# Altium PCB LCboardPCB.PcbDoc (part 1 of 2)
Units mil, origin at the board's own origin, x right, y up, seen from the top; angles counter-clockwise.
Board outline 1635 x 3515 mil, 6 copper layers (Top Layer, Mid-Layer 1, Internal Plane 1, Internal Plane 2, Mid-Layer 2, Bottom Layer); 117 components, 210 nets, 605 pads, 96 vias.
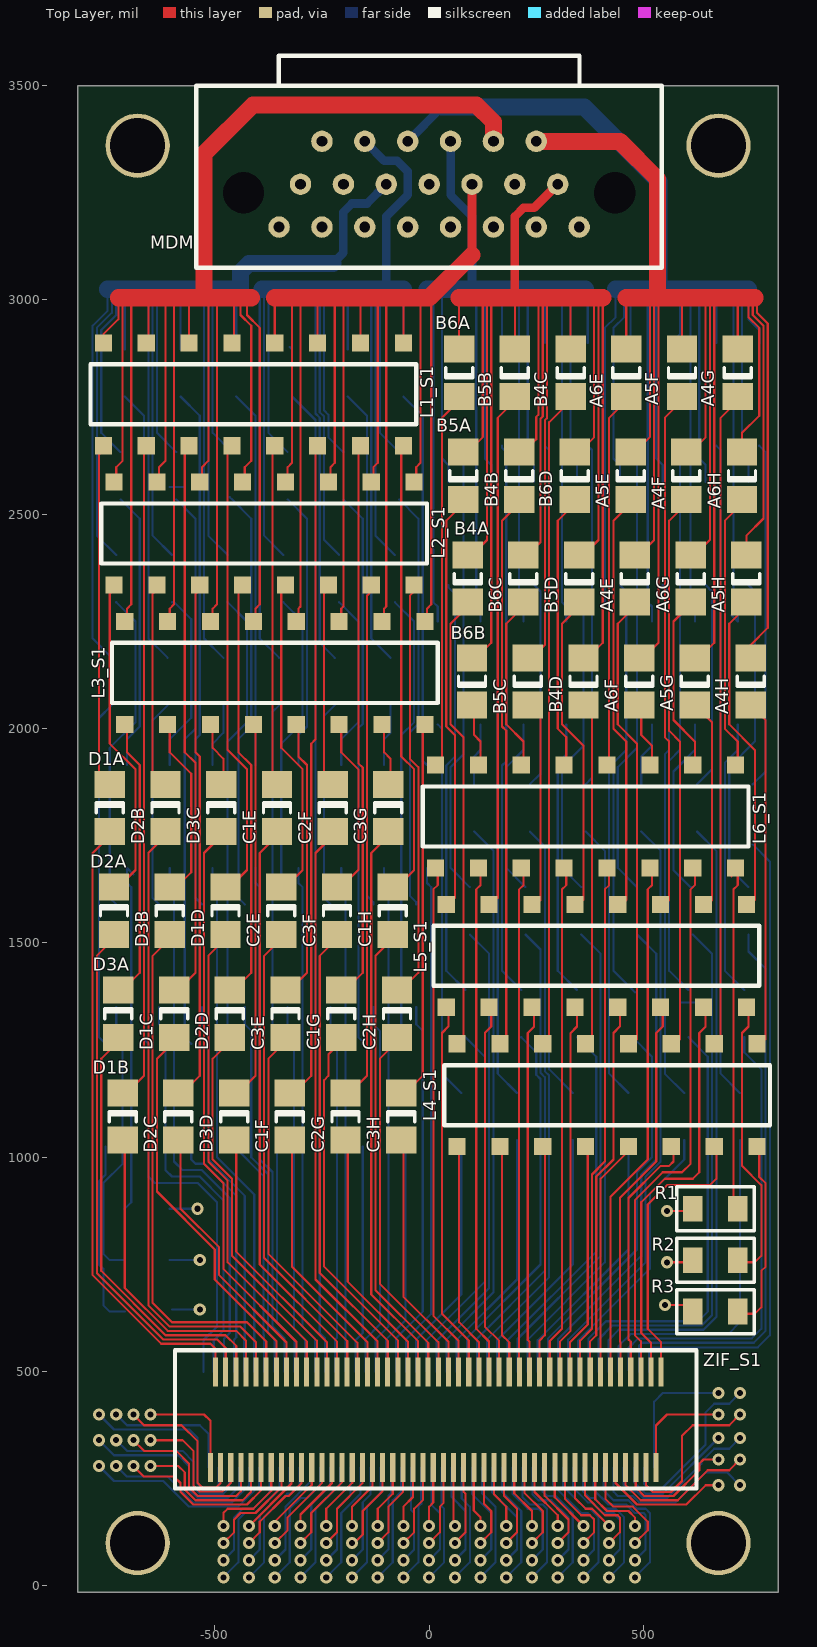
[diagram p0: Top Layer view]
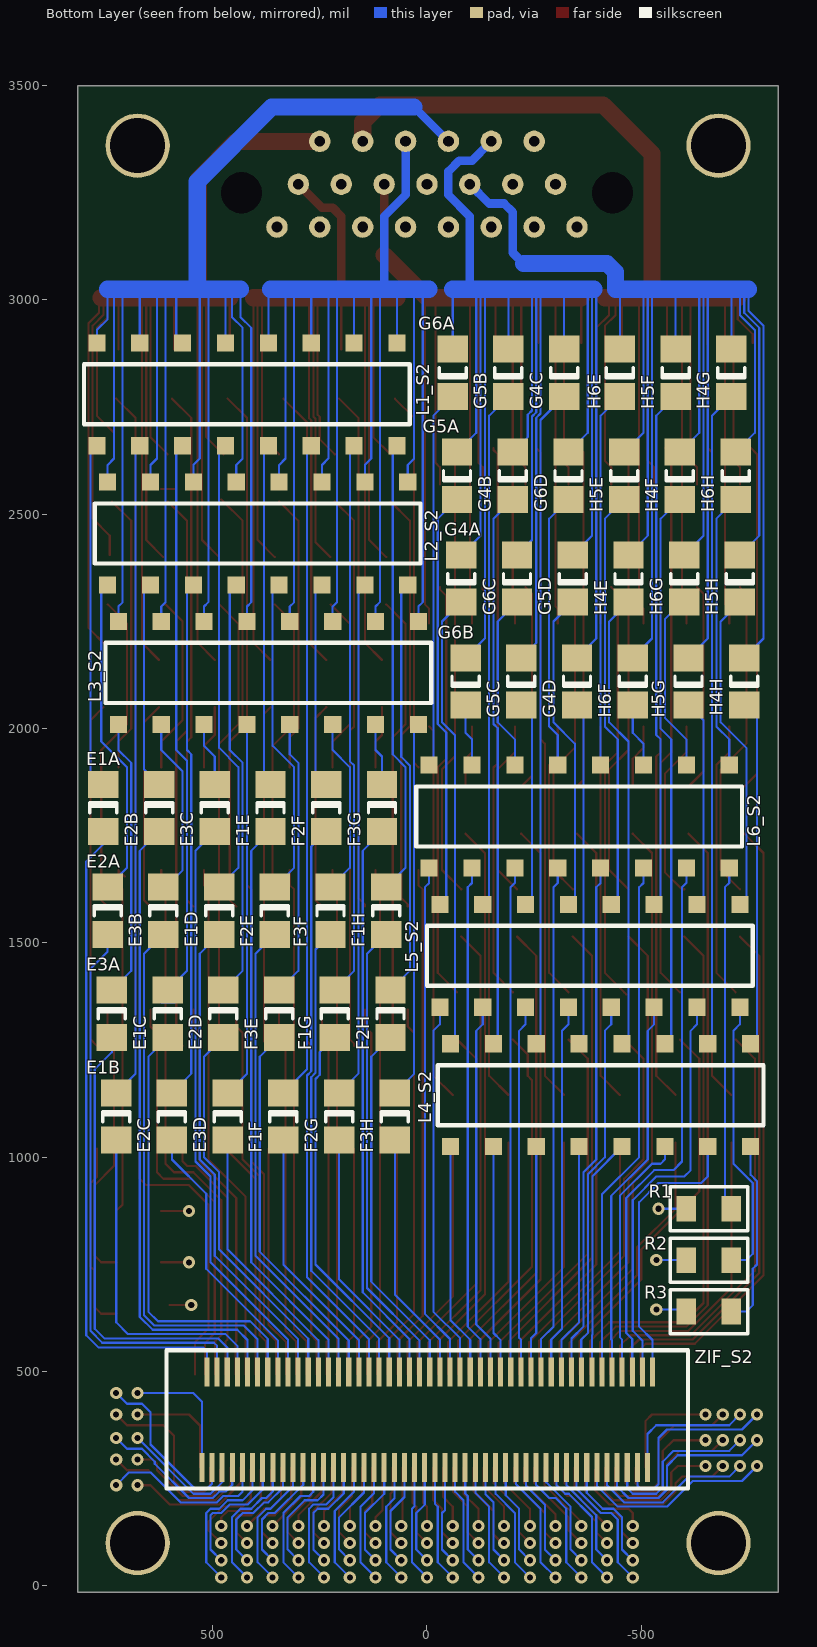
[diagram p1: Bottom Layer view, seen from below]
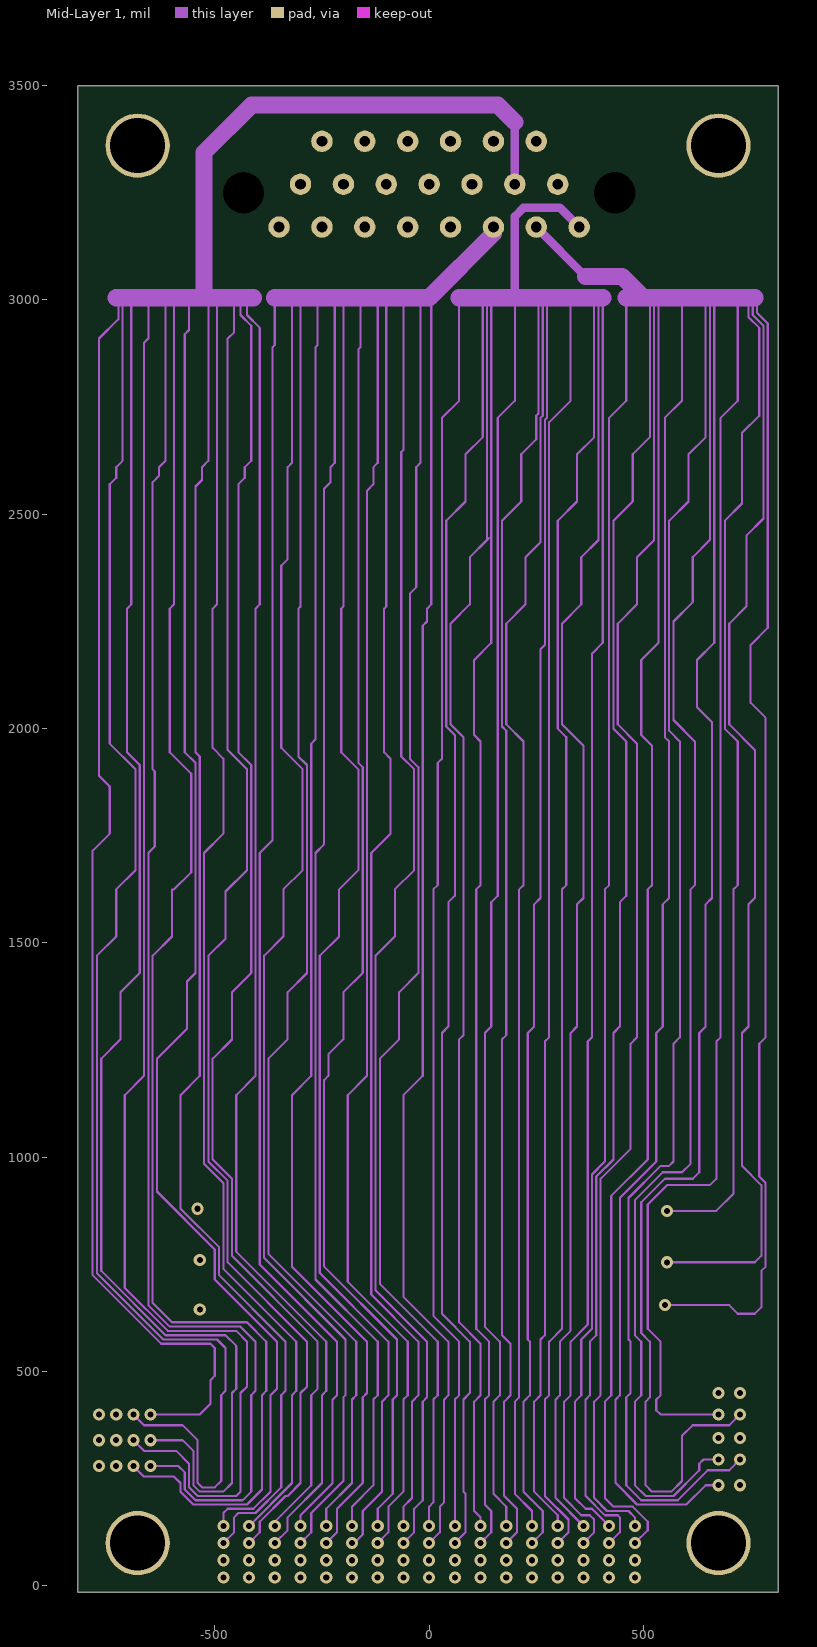
[diagram p2: Mid-Layer 1]
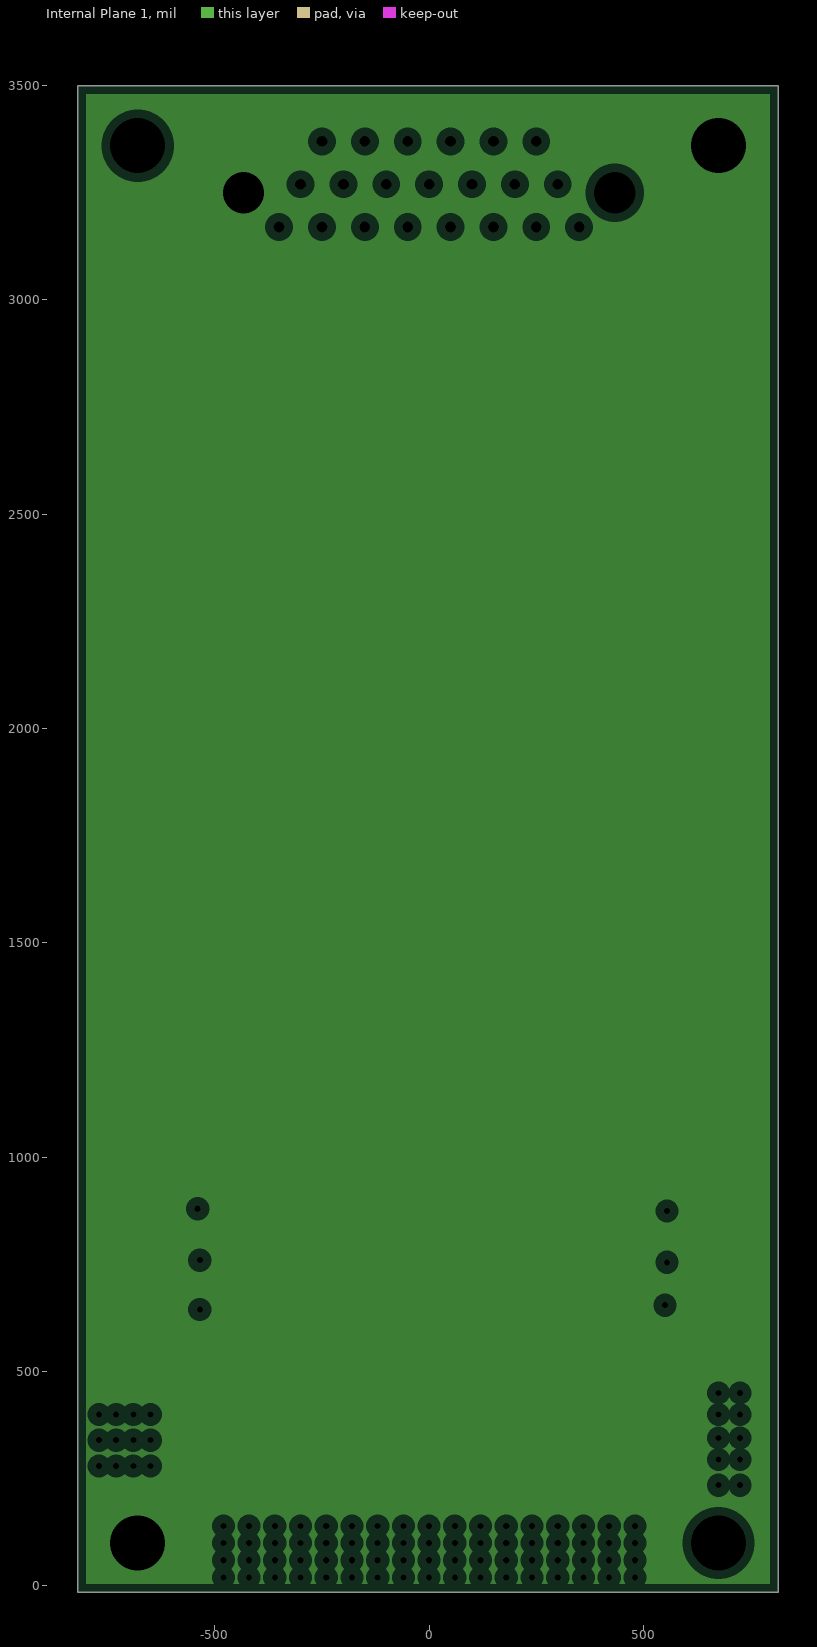
[diagram p3: Internal Plane 1, clearances drawn from the general rule]
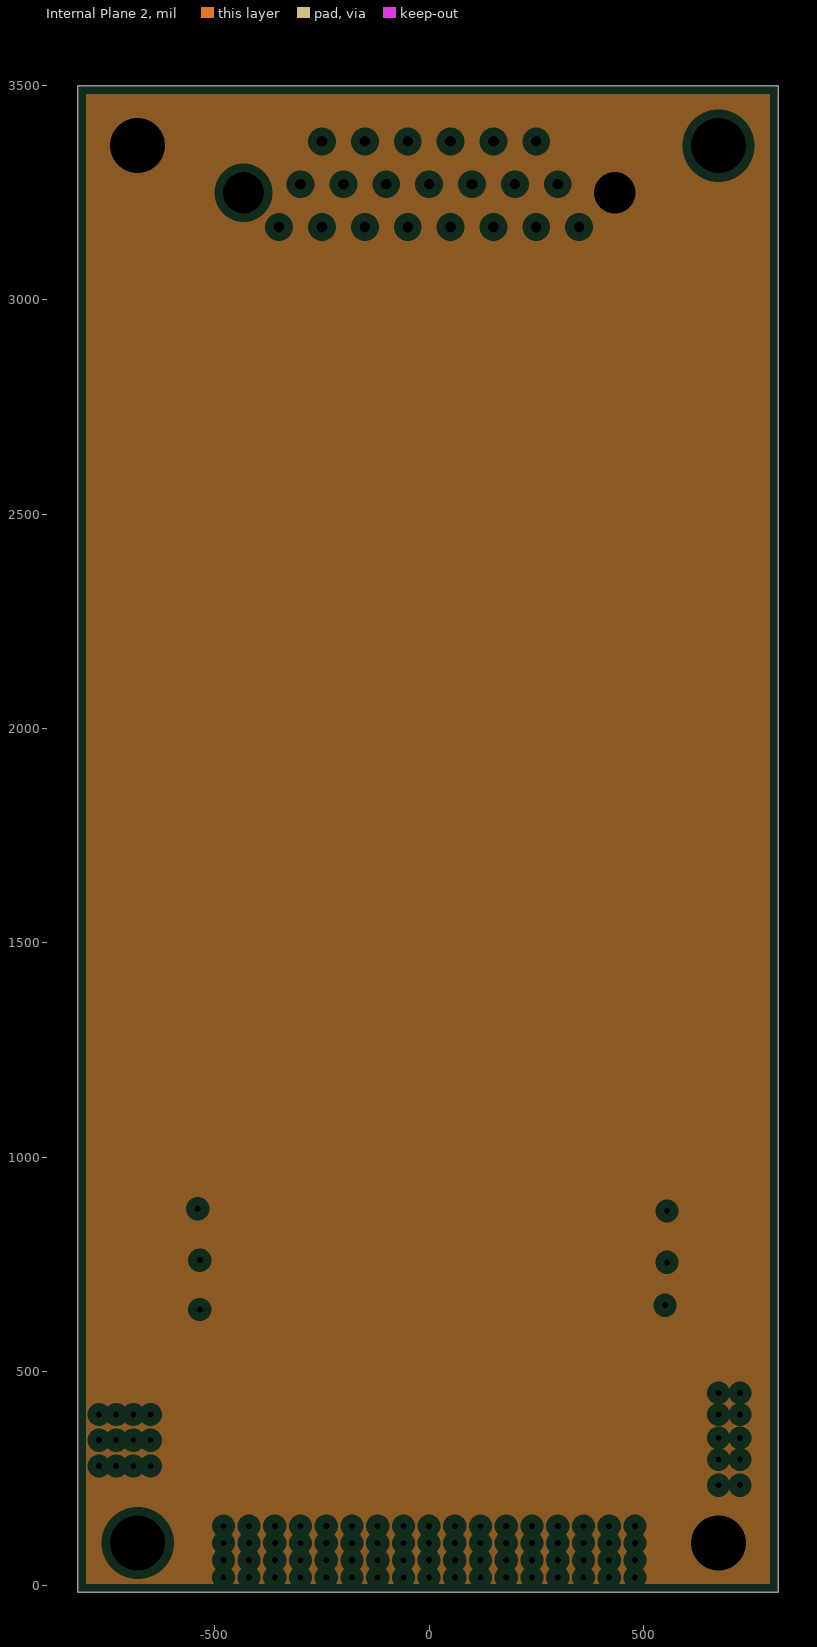
[diagram p4: Internal Plane 2, clearances drawn from the general rule]
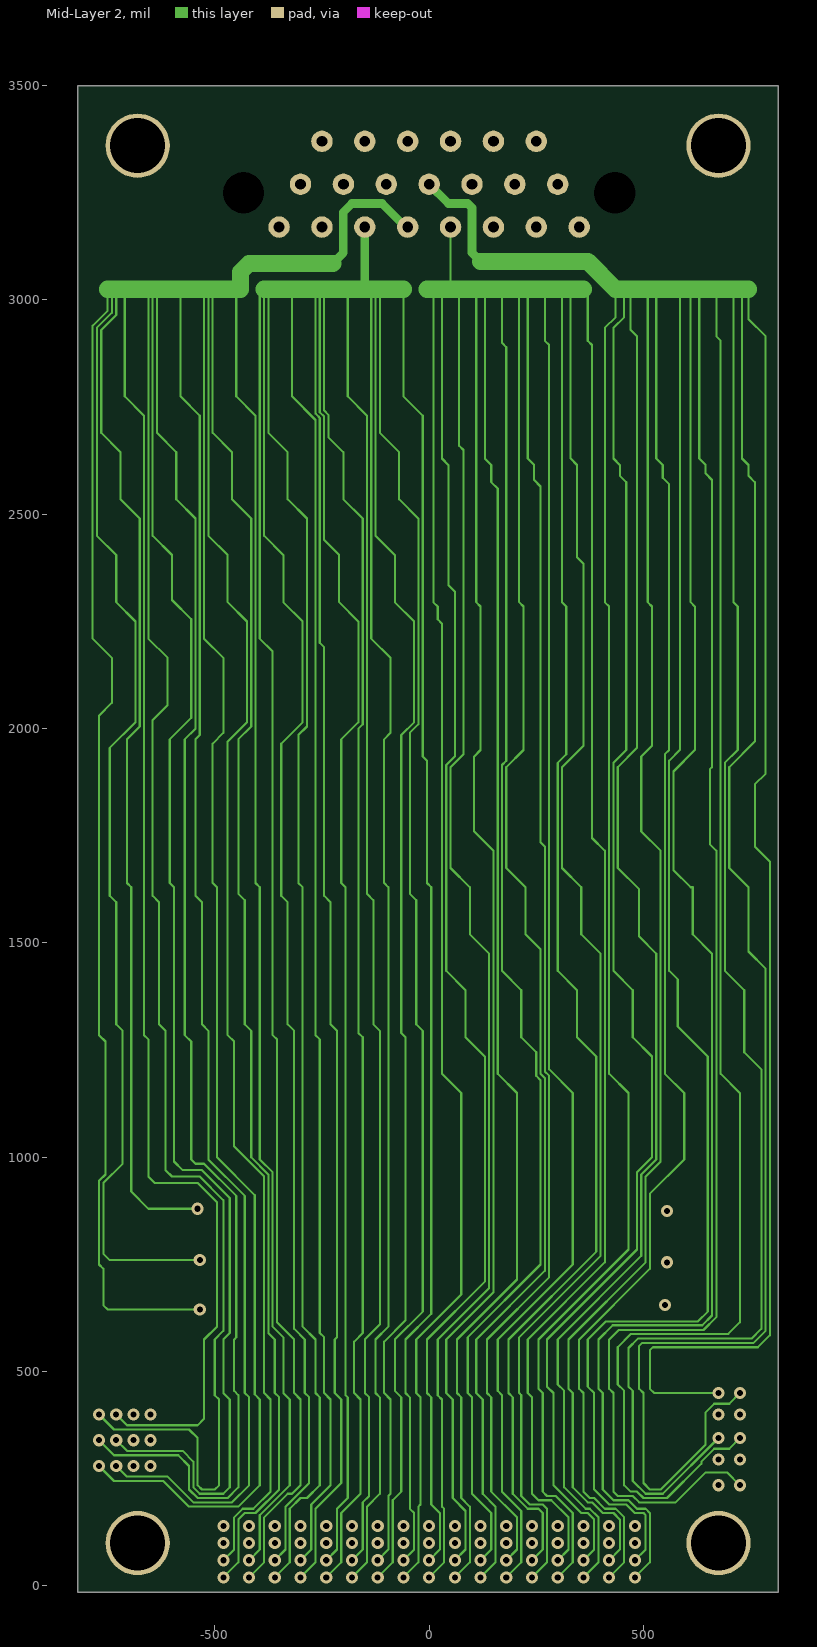
[diagram p5: Mid-Layer 2]

## Layer stack, top to bottom
Top Layer: signal copper 1.4
Dielectric: core 12.6, FR-4, Dk 4.8
Mid-Layer 1: signal copper 1.4
Dielectric: prepreg 12.6, FR-4, Dk 4.8
Internal Plane 1: plane copper 1.4, net GND1
Dielectric: core 12.6, FR-4, Dk 4.8
Internal Plane 2: plane copper 1.4, net GND2
Dielectric: prepreg 12.6, FR-4, Dk 4.8
Mid-Layer 2: signal copper 1.4
Dielectric: core 12.6, FR-4, Dk 4.8
Bottom Layer: signal copper 1.4

## Board outline
-820,3500 -820,-15 815,-15 815,3500 -820,3500

## Design rules (kind name [scope] priority, off if disabled: settings)
Clearance [All] p1: gap=5
ComponentClearance [All] p1: gap=9 collisioncheckmode=3 verticalgap=10 showdistances=FALSE
HoleSize [All] p1: absolutevalues=TRUE maxlimit=200 minlimit=1 maxpercent=80.000 minpercent=20.000
HoleToHoleClearance [All] p1: gap=5 allowstackedmicrovias=TRUE
MinimumSolderMaskSliver [All] p1: minsoldermaskwidth=4
PlaneClearance [All] p1: clearance=20
PlaneConnect [All] p1: planeconnectstyle=Relief reliefexpansion=20 reliefentries=4 reliefconductorwidth=10 reliefairgap=10
PolygonConnect [All] p1: connectstyle=Relief reliefconductorwidth=10 reliefentries=4 polygonreliefangle="90 Angle"
RoomDefinition S2 [InComponentClass('S2')] p1: confinementstyle=ConfineIn formatcopy=TRUE lockcomponents=TRUE outline 860,200 -840,200 -840,3000 860,3000
RoomDefinition S1 [InComponentClass('S1')] p2: confinementstyle=ConfineIn formatcopy=TRUE lockcomponents=TRUE outline -850,200 850,200 850,3000 -850,3000
RoomDefinition LCboardRev2 [InComponentClass('LCboardRev2')] p3: confinementstyle=ConfineIn formatcopy=TRUE lockcomponents=FALSE outline -895,-125 889,-125 889,3654 -895,3654
RoutingVias [All] p1: holewidth=14.17 width=28.35 viastyle="Through Hole" minholewidth=14.17 minwidth=28.35 maxholewidth=28 maxwidth=50
SilkToSilkClearance [All] p1 off: silktosilkclearance=5
SilkscreenOverComponentPads [All] p1: minsilkscreentomaskgap=5
SolderMaskExpansion [All] p1: expansion=3.5
Width [All] p1: maxlimit=100 minlimit=5 preferedwidth=5
20 further rules are at their usual default settings.

## Classes and differential pairs
component class S2: E1A E1B E1C E1D E2A E2B E2C E2D E3A E3B E3C E3D F1E F1F F1G F1H F2E F2F F2G F2H F3E F3F F3G F3H G4A G4B G4C G4D G5A G5B G5C G5D G6A G6B G6C G6D H4E H4F H4G H4H H5E H5F H5G H5H H6E H6F H6G H6H L1_S2 L2_S2 L3_S2 L4_S2 L5_S2 L6_S2 R1 R2 R3 ZIF_S2
component class S1: A4E A4F A4G A4H A5E A5F A5G A5H A6E A6F a6g a6h B4A B4B B4C B4D B5A B5B B5C B5D B6A B6B B6C B6D C1E C1F C1G C1H C2E C2F C2G C2H C3E C3F C3G C3H D1A D1B D1C D1D D2A D2B D2C D2D D3A D3B D3C D3D L1_S1 L2_S1 L3_S1 L4_S1 L5_S1 L6_S1 R1 R1_S1 R2 R2_S1 R3 R3_S1 ZIF_S1
channel class OneSideOfBoard: S1 S2
component class LCboardRev2: MDM

## Components (designator, comment, footprint, x,y, rotation, side; value= is the part's Value field where it differs from the comment)
A4E "47nF" CC3216-1206 480,2350 r90 top (schematic designator C7)
A4F "47nF" CC3216-1206 600,2590 r90 top (schematic designator C19)
A4G "47nF" CC3216-1206 720,2830 r90 top (schematic designator C31)
A4H "47nF" CC3216-1206 750,2110 r90 top (schematic designator C43)
A5E "47nF" CC3216-1206 470,2590 r90 top (schematic designator C9)
A5F "47nF" CC3216-1206 590,2830 r90 top (schematic designator C21)
A5G "47nF" CC3216-1206 620,2110 r90 top (schematic designator C33)
A5H "47nF" CC3216-1206 740,2350 r90 top (schematic designator C45)
A6E "47nF" CC3216-1206 460,2830 r90 top (schematic designator C11)
A6F "47nF" CC3216-1206 490,2110 r90 top (schematic designator C23)
A6G "47nF" CC3216-1206 610,2350 r90 top (schematic designator C35)
A6H "47nF" CC3216-1206 730,2590 r90 top (schematic designator C47)
B4A "47nF" CC3216-1206 90,2350 r90 top (schematic designator C8)
B4B "47nF" CC3216-1206 210,2590 r90 top (schematic designator C20)
B4C "47nF" CC3216-1206 330,2830 r90 top (schematic designator C32)
B4D "47nF" CC3216-1206 360,2110 r90 top (schematic designator C44)
B5A "47nF" CC3216-1206 80,2590 r90 top (schematic designator C10)
B5B "47nF" CC3216-1206 200,2830 r90 top (schematic designator C22)
B5C "47nF" CC3216-1206 230,2110 r90 top (schematic designator C34)
B5D "47nF" CC3216-1206 350,2350 r90 top (schematic designator C46)
B6A "47nF" CC3216-1206 70,2830 r90 top (schematic designator C12)
B6B "47nF" CC3216-1206 100,2110 r90 top (schematic designator C24)
B6C "47nF" CC3216-1206 220,2350 r90 top (schematic designator C36)
B6D "47nF" CC3216-1206 340,2590 r90 top (schematic designator C48)
C1E "47nF" CC3216-1206 -355,1815 r270 top (schematic designator C38)
C1F "47nF" CC3216-1206 -325,1095 r270 top (schematic designator C26)
C1G "47nF" CC3216-1206 -205,1335 r270 top (schematic designator C14)
C1H "47nF" CC3216-1206 -85,1575 r270 top (schematic designator C2)
C2E "47nF" CC3216-1206 -345,1575 r270 top (schematic designator C40)
C2F "47nF" CC3216-1206 -225,1815 r270 top (schematic designator C28)
C2G "47nF" CC3216-1206 -195,1095 r270 top (schematic designator C16)
C2H "47nF" CC3216-1206 -75,1335 r270 top (schematic designator C4)
C3E "47nF" CC3216-1206 -335,1335 r270 top (schematic designator C42)
C3F "47nF" CC3216-1206 -215,1575 r270 top (schematic designator C30)
C3G "47nF" CC3216-1206 -95,1815 r270 top (schematic designator C18)
C3H "47nF" CC3216-1206 -65,1095 r270 top (schematic designator C6)
D1A "47nF" CC3216-1206 -745,1815 r270 top (schematic designator C37)
D1B "47nF" CC3216-1206 -715,1095 r270 top (schematic designator C25)
D1C "47nF" CC3216-1206 -595,1335 r270 top (schematic designator C13)
D1D "47nF" CC3216-1206 -475,1575 r270 top (schematic designator C1)
D2A "47nF" CC3216-1206 -735,1575 r270 top (schematic designator C39)
D2B "47nF" CC3216-1206 -615,1815 r270 top (schematic designator C27)
D2C "47nF" CC3216-1206 -585,1095 r270 top (schematic designator C15)
D2D "47nF" CC3216-1206 -465,1335 r270 top (schematic designator C3)
D3A "47nF" CC3216-1206 -725,1335 r270 top (schematic designator C41)
D3B "47nF" CC3216-1206 -605,1575 r270 top (schematic designator C29)
D3C "47nF" CC3216-1206 -485,1815 r270 top (schematic designator C17)
D3D "47nF" CC3216-1206 -455,1095 r270 top (schematic designator C5)
E1A "47nF" CC3216-1206 755,1815 r270 bottom (schematic designator C37)
E1B "47nF" CC3216-1206 725,1095 r270 bottom (schematic designator C25)
E1C "47nF" CC3216-1206 605,1335 r270 bottom (schematic designator C13)
E1D "47nF" CC3216-1206 485,1575 r270 bottom (schematic designator C1)
E2A "47nF" CC3216-1206 745,1575 r270 bottom (schematic designator C39)
E2B "47nF" CC3216-1206 625,1815 r270 bottom (schematic designator C27)
E2C "47nF" CC3216-1206 595,1095 r270 bottom (schematic designator C15)
E2D "47nF" CC3216-1206 475,1335 r270 bottom (schematic designator C3)
E3A "47nF" CC3216-1206 735,1335 r270 bottom (schematic designator C41)
E3B "47nF" CC3216-1206 615,1575 r270 bottom (schematic designator C29)
E3C "47nF" CC3216-1206 495,1815 r270 bottom (schematic designator C17)
E3D "47nF" CC3216-1206 465,1095 r270 bottom (schematic designator C5)
F1E "47nF" CC3216-1206 365,1815 r270 bottom (schematic designator C38)
F1F "47nF" CC3216-1206 335,1095 r270 bottom (schematic designator C26)
F1G "47nF" CC3216-1206 215,1335 r270 bottom (schematic designator C14)
F1H "47nF" CC3216-1206 95,1575 r270 bottom (schematic designator C2)
F2E "47nF" CC3216-1206 355,1575 r270 bottom (schematic designator C40)
F2F "47nF" CC3216-1206 235,1815 r270 bottom (schematic designator C28)
F2G "47nF" CC3216-1206 205,1095 r270 bottom (schematic designator C16)
F2H "47nF" CC3216-1206 85,1335 r270 bottom (schematic designator C4)
F3E "47nF" CC3216-1206 345,1335 r270 bottom (schematic designator C42)
F3F "47nF" CC3216-1206 225,1575 r270 bottom (schematic designator C30)
F3G "47nF" CC3216-1206 105,1815 r270 bottom (schematic designator C18)
F3H "47nF" CC3216-1206 75,1095 r270 bottom (schematic designator C6)
G4A "47nF" CC3216-1206 -80,2350 r90 bottom (schematic designator C8)
G4B "47nF" CC3216-1206 -200,2590 r90 bottom (schematic designator C20)
G4C "47nF" CC3216-1206 -320,2830 r90 bottom (schematic designator C32)
G4D "47nF" CC3216-1206 -350,2110 r90 bottom (schematic designator C44)
G5A "47nF" CC3216-1206 -70,2590 r90 bottom (schematic designator C10)
G5B "47nF" CC3216-1206 -190,2830 r90 bottom (schematic designator C22)
G5C "47nF" CC3216-1206 -220,2110 r90 bottom (schematic designator C34)
G5D "47nF" CC3216-1206 -340,2350 r90 bottom (schematic designator C46)
G6A "47nF" CC3216-1206 -60,2830 r90 bottom (schematic designator C12)
G6B "47nF" CC3216-1206 -90,2110 r90 bottom (schematic designator C24)
G6C "47nF" CC3216-1206 -210,2350 r90 bottom (schematic designator C36)
G6D "47nF" CC3216-1206 -330,2590 r90 bottom (schematic designator C48)
H4E "47nF" CC3216-1206 -470,2350 r90 bottom (schematic designator C7)
H4F "47nF" CC3216-1206 -590,2590 r90 bottom (schematic designator C19)
H4G "47nF" CC3216-1206 -710,2830 r90 bottom (schematic designator C31)
H4H "47nF" CC3216-1206 -740,2110 r90 bottom (schematic designator C43)
H5E "47nF" CC3216-1206 -460,2590 r90 bottom (schematic designator C9)
H5F "47nF" CC3216-1206 -580,2830 r90 bottom (schematic designator C21)
H5G "47nF" CC3216-1206 -610,2110 r90 bottom (schematic designator C33)
H5H "47nF" CC3216-1206 -730,2350 r90 bottom (schematic designator C45)
H6E "47nF" CC3216-1206 -450,2830 r90 bottom (schematic designator C11)
H6F "47nF" CC3216-1206 -480,2110 r90 bottom (schematic designator C23)
H6G "47nF" CC3216-1206 -600,2350 r90 bottom (schematic designator C35)
H6H "47nF" CC3216-1206 -720,2590 r90 bottom (schematic designator C47)
L1_S1 "8 inductors" "LCBOARDINDUCTOR8 - MECH2" -60,2900 r270 top (schematic designator L1)
L1_S2 "8 inductors" "LCBOARDINDUCTOR8 - MECH3" 70,2900 r270 bottom (schematic designator L1)
L2_S1 "8 inductors" "LCBOARDINDUCTOR8 - MECH2" -35,2575 r270 top (schematic designator L2)
L2_S2 "8 inductors" "LCBOARDINDUCTOR8 - MECH3" 45,2575 r270 bottom (schematic designator L2)
L3_S1 "8 inductors" "LCBOARDINDUCTOR8 - MECH2" -10,2250 r270 top (schematic designator L3)
L3_S2 "8 inductors" "LCBOARDINDUCTOR8 - MECH3" 20,2250 r270 bottom (schematic designator L3)
L4_S1 "8 inductors" "LCBOARDINDUCTOR8 - MECH2" 65,1025 r90 top (schematic designator L4)
L4_S2 "8 inductors" "LCBOARDINDUCTOR8 - MECH3" -55,1025 r90 bottom (schematic designator L4)
L5_S1 "8 inductors" "LCBOARDINDUCTOR8 - MECH2" 40,1350 r90 top (schematic designator L5)
L5_S2 "8 inductors" "LCBOARDINDUCTOR8 - MECH3" -30,1350 r90 bottom (schematic designator L5)
L6_S1 "8 inductors" "LCBOARDINDUCTOR8 - MECH2" 15,1675 r90 top (schematic designator L6)
L6_S2 "8 inductors" "LCBOARDINDUCTOR8 - MECH3" -5,1675 r90 bottom (schematic designator L6)
MDM "LCBoard_GlenairMicroDsub21" MicroD-MWDM2L-21SCBRP-.110 -300,3270 r0 top (schematic designator J1)
R1 "" 1206 -605,880 r180 bottom
R1 "" 1206 615,880 r0 top
R2 "" 1206 -605,760 r180 bottom
R2 "" 1206 615,760 r0 top
R3 "" 1206 -605,640 r180 bottom
R3 "" 1206 615,640 r0 top
ZIF_S1 "ZIF Connector" LCBoard_ZIFCon#1 -510,310 r0 top (schematic designator J2)
ZIF_S2 "ZIF Connector" LCBoard_ZIFCon#2 525,310 r180 bottom (schematic designator J2)

## Footprints (in the part's own frame and the unit in brackets; to place one, negate y for a bottom-side part, rotate by r counter-clockwise, add the part's x,y. Pads: shape width x height; smd on the part's side, far side on the other; paste and mask are expansions set on the pad)
1206 [mil]
  rect 45x60 smd: 1(0,0) 2(105,0)
  silkscreen extent -37,-51 144,51
CC3216-1206 [mm]
  rect 1.6x1.8 smd: 1(-1.4,0) 2(1.4,0)
  silkscreen extent -0.3,-0.8 0.3,0.8
LCBoard_ZIFCon#1 [mm] "HFP190CT-ND"
  rect 0.3x1.7 smd: 1(0,-0.85) 2(0.3,4.8) 3(0.6,-0.85) 4(0.9,4.8) 5(1.2,-0.85) 6(1.5,4.8) 7(1.8,-0.85) 8(2.1,4.8) 9(2.4,-0.85) 10(2.7,4.8) 11(3,-0.85) 12(3.3,4.8) 13(3.6,-0.85) 14(3.9,4.8) 15(4.2,-0.85) 16(4.5,4.8) 17(4.8,-0.85) 18(5.1,4.8) 19(5.4,-0.85) 20(5.7,4.8) 21(6,-0.85) 22(6.3,4.8) 23(6.6,-0.85) 24(6.9,4.8) 25(7.2,-0.85) 26(7.5,4.8) 27(7.8,-0.85) 28(8.1,4.8) 29(8.4,-0.85) 30(8.7,4.8) 31(9,-0.85) 32(9.3,4.8) 33(9.6,-0.85) 34(9.9,4.8) 35(10.2,-0.85) 36(10.5,4.8) 37(10.8,-0.85) 38(11.1,4.8) 39(11.4,-0.85) 40(11.7,4.8) 41(12,-0.85) 42(12.3,4.8) 43(12.6,-0.85) 44(12.9,4.8) 45(13.2,-0.85) 46(13.5,4.8) 47(13.8,-0.85) 48(14.1,4.8) 49(14.4,-0.85) 50(14.7,4.8) 51(15,-0.85) 52(15.3,4.8) 53(15.6,-0.85) 54(15.9,4.8) 55(16.2,-0.85) 56(16.5,4.8) 57(16.8,-0.85) 58(17.1,4.8) 59(17.4,-0.85) 60(17.7,4.8) 61(18,-0.85) 62(18.3,4.8) 63(18.6,-0.85) 64(18.9,4.8) 65(19.2,-0.85) 66(19.5,4.8) 67(19.8,-0.85) 68(20.1,4.8) 69(20.4,-0.85) 70(20.7,4.8) 71(21,-0.85) 72(21.3,4.8) 73(21.6,-0.85) 74(21.9,4.8) 75(22.2,-0.85) 76(22.5,4.8) 77(22.8,-0.85) 78(23.1,4.8) 79(23.4,-0.85) 80(23.7,4.8) 81(24,-0.85) 82(24.3,4.8) 83(24.6,-0.85) 84(24.9,4.8) 85(25.2,-0.85) 86(25.5,4.8) 87(25.8,-0.85) 88(26.1,4.8) 89(26.4,-0.85) 90(26.7,4.8)
  round 0.5 on Top Overlay: 2(-2.3,-2.4)
  silkscreen extent -2.1,-2.1 28.8,6.1
LCBoard_ZIFCon#2 [mm]
  rect 0.3x1.7 smd: 1(0,-0.85) 2(0.3,4.8) 3(0.6,-0.85) 4(0.9,4.8) 5(1.2,-0.85) 6(1.5,4.8) 7(1.8,-0.85) 8(2.1,4.8) 9(2.4,-0.85) 10(2.7,4.8) 11(3,-0.85) 12(3.3,4.8) 13(3.6,-0.85) 14(3.9,4.8) 15(4.2,-0.85) 16(4.5,4.8) 17(4.8,-0.85) 18(5.1,4.8) 19(5.4,-0.85) 20(5.7,4.8) 21(6,-0.85) 22(6.3,4.8) 23(6.6,-0.85) 24(6.9,4.8) 25(7.2,-0.85) 26(7.5,4.8) 27(7.8,-0.85) 28(8.1,4.8) 29(8.4,-0.85) 30(8.7,4.8) 31(9,-0.85) 32(9.3,4.8) 33(9.6,-0.85) 34(9.9,4.8) 35(10.2,-0.85) 36(10.5,4.8) 37(10.8,-0.85) 38(11.1,4.8) 39(11.4,-0.85) 40(11.7,4.8) 41(12,-0.85) 42(12.3,4.8) 43(12.6,-0.85) 44(12.9,4.8) 45(13.2,-0.85) 46(13.5,4.8) 47(13.8,-0.85) 48(14.1,4.8) 49(14.4,-0.85) 50(14.7,4.8) 51(15,-0.85) 52(15.3,4.8) 53(15.6,-0.85) 54(15.9,4.8) 55(16.2,-0.85) 56(16.5,4.8) 57(16.8,-0.85) 58(17.1,4.8) 59(17.4,-0.85) 60(17.7,4.8) 61(18,-0.85) 62(18.3,4.8) 63(18.6,-0.85) 64(18.9,4.8) 65(19.2,-0.85) 66(19.5,4.8) 67(19.8,-0.85) 68(20.1,4.8) 69(20.4,-0.85) 70(20.7,4.8) 71(21,-0.85) 72(21.3,4.8) 73(21.6,-0.85) 74(21.9,4.8) 75(22.2,-0.85) 76(22.5,4.8) 77(22.8,-0.85) 78(23.1,4.8) 79(23.4,-0.85) 80(23.7,4.8) 81(24,-0.85) 82(24.3,4.8) 83(24.6,-0.85) 84(24.9,4.8) 85(25.2,-0.85) 86(25.5,4.8) 87(25.8,-0.85) 88(26.1,4.8) 89(26.4,-0.85) 90(26.7,4.8)
  round 0.5 on Bottom Overlay: 2(-2.3,-2.4)
  silkscreen extent -2.1,-2.1 28.8,6.1
"LCBOARDINDUCTOR8 - MECH2" [mil]
  rect 40x40 smd: 1(0,0) 2(0,-100) 3(0,-200) 4(0,-300) 5(0,-400) 6(0,-500) 7(0,-600) 8(0,-700) 9(240,-700) 10(240,-600) 11(240,-500) 12(240,-400) 13(240,-300) 14(240,-200) 15(240,-100) 16(240,0)
  silkscreen extent 50,-730 190,30
"LCBOARDINDUCTOR8 - MECH3" [mil]
  rect 40x40 smd: 1(0,0) 2(0,-100) 3(0,-200) 4(0,-300) 5(0,-400) 6(0,-500) 7(0,-600) 8(0,-700) 9(240,-700) 10(240,-600) 11(240,-500) 12(240,-400) 13(240,-300) 14(240,-200) 15(240,-100) 16(240,0)
  silkscreen extent 50,-730 190,30
MicroD-MWDM2L-21SCBRP-.110 [mil] "Glenair MicroD 21 pin"
  round 50 hole 25: 1(600,0) 2(550,100) 3(450,100) 4(400,0) 5(350,100) 6(250,100) 7(200,0) 8(150,100) 9(100,0) 10(50,100) 11(0,0) 12(650,-100) 13(550,-100) 14(500,0) 15(450,-100) 16(350,-100) 17(300,0) 18(250,-100) 19(150,-100) 20(50,-100) 21(-50,-100)
  round 60 hole 96: MH1(-133,-20) MH2(733,-20)
  silkscreen extent -243,-195 843,300

## Part data
A4E A4F A4G A4H A5E A5F A5G A5H A6E A6F A6G A6H B4A B4B B4C B4D B5A B5B B5C B5D B6A B6B B6C B6D C1E C1F C1G C1H C2E C2F C2G C2H C3E C3F C3G C3H D1A D1B D1C D1D D2A D2B D2C D2D D3A D3B D3C D3D E1A E1B E1C E1D E2A E2B E2C E2D E3A E3B E3C E3D F1E F1F F1G F1H F2E F2F F2G F2H F3E F3F F3G F3H G4A G4B G4C G4D G5A G5B G5C G5D G6A G6B G6C G6D H4E H4F H4G H4H H5E H5F H5G H5H H6E H6F H6G H6H: library part "Cap Semi_1", "Capacitor (Semiconductor SIM Model)"
L1_S1 L1_S2 L2_S1 L2_S2 L3_S1 L3_S2 L4_S1 L4_S2 L5_S1 L5_S2 L6_S1 L6_S2: library part LCboardInductor8
R1 R1 R2 R2 R3 R3: library part Res1206, "Resistor"
ZIF_S1 ZIF_S2: library part LCboard_FH16-90S-0.3SHW(05)

## Free pads (board coordinates)
  round 150 hole 128.5: 0(-680,100) 0(-680,3360) 0(675,100) 0(675,3360)

## Via types
v1: diameter 28.35, hole 14.17, Top Layer to Bottom Layer, 96 vias

## Nets (pads, with @x,y where several pads share a name; then routed paths per layer and width w, separated by ;. In a path a pad name is that pad's centre, name@x,y a point inside that pad or via, vN(x,y) a via of type N, cw(c..) or ccw(c..) an arc to the next point about the centre after c; other vN are vias at no path point)
GND1: MDM.MH1 pad.0@675,3360 pad.0@-680,100
GND2: MDM.MH2 pad.0@675,100 pad.0@-680,3360
NetC1_S1_1: D1D.1 L1_S1.12 | length 1073.4
  Top Layer w5: D1D.1@-470,1625.12 -425,1670.12 -425,1905 -470,1950 -470,2640 L1_S1.12@-455,2655
NetC1_S1_2: D1D.2 ZIF_S1.20 | length 1134.6
  Top Layer w5: D1D.2@-470,1514.88 -515,1469.88 -515,990 -470,945 -470,755 -285.59,570.59 ZIF_S1.20@-285.59,498.98 ZIF_S1.20@-285.59,493.98
NetC1_S2_1: E1D.1 L1_S2.12 | length 1073.4
  Bottom Layer w5: L1_S2.12@470,2660 485,2645 485,1955 440,1910 440,1675.12 E1D.1@485,1630.12
NetC1_S2_2: E1D.2 ZIF_S2.20 | length 1134.6
  Bottom Layer w5: ZIF_S2.20@300.59,498.98 300.59,575.59 495,770 495,960 530,995 530,1474.88 E1D.2@485,1519.88
NetC2_S1_1: C1H.1 L1_S1.16 | length 1065.1
  Top Layer w5: C1H.1@-80,1625.12 -35,1670.12 -35,1905 -65,1935 -65,2645 L1_S1.16@-55,2655
NetC2_S1_2: C1H.2 ZIF_S1.44 | length 1090.4
  Top Layer w5: C1H.2@-80,1514.88 -125,1469.88 -125,690 -2.13,567.13 ZIF_S1.44@-2.13,493.98
NetC2_S2_1: F1H.1 L1_S2.16 | length 1065.1
  Bottom Layer w5: L1_S2.16@70,2660 80,2650 80,1940 50,1910 50,1675.12 F1H.1@95,1630.12
NetC2_S2_2: F1H.2 ZIF_S2.44 | length 1090.4
  Bottom Layer w5: ZIF_S2.44@17.13,498.98 17.13,572.13 140,695 140,1474.88 F1H.2@95,1519.88
NetC3_S1_1: D2D.1 L2_S1.12 | length 989.2
  Top Layer w5: D2D.1@-465,1380.12 -460,1385.12 -415,1430.12 -415,1915 -445,1945 -445,2315 L2_S1.12@-430,2330
NetC3_S1_2: D2D.2 ZIF_S1.22 | length 900.2
  Top Layer w5: D2D.2@-460,1274.88 -505,1229.88 -505,995 -460,950 -460,770 -261.97,571.97 ZIF_S1.22@-261.97,498.98 ZIF_S1.22@-261.97,493.98
NetC3_S2_1: E2D.1 L2_S2.12 | length 989.2
  Bottom Layer w5: L2_S2.12@445,2335 460,2320 460,1950 430,1920 430,1435.12 E2D.1@475,1390.12 E2D.1@480,1385.12
NetC3_S2_2: E2D.2 ZIF_S2.22 | length 900.2
  Bottom Layer w5: ZIF_S2.22@276.97,498.98 276.97,576.97 485,785 485,965 520,1000 520,1234.88 E2D.2@475,1279.88
NetC4_S1_1: C2H.1 L2_S1.16 | length 978
  Top Layer w5: C2H.1@-70,1385.12 -25,1430.12 -25,1910 -45,1930 -45,2310 -30,2325 L2_S1.16@-30,2330
NetC4_S1_2: C2H.2 ZIF_S1.46 | length 856.1
  Top Layer w5: C2H.2@-70,1274.88 -115,1229.88 -115,705 21.5,568.5 ZIF_S1.46@21.5,493.98
NetC4_S2_1: F2H.1 L2_S2.16 | length 978
  Bottom Layer w5: L2_S2.16@45,2335 45,2330 60,2315 60,1934.14 40,1914.14 40,1435.12 F2H.1@85,1390.12
NetC4_S2_2: F2H.2 ZIF_S2.46 | length 856.1
  Bottom Layer w5: ZIF_S2.46@-6.5,498.98 -6.5,573.5 130,710 130,1234.88 F2H.2@85,1279.88
NetC5_S1_1: D3D.1 L3_S1.12 | length 878.5
  Top Layer w5: D3D.1@-450,1145.12 -405,1190.12 L3_S1.12@-405,2005
NetC5_S1_2: D3D.2 ZIF_S1.24 | length 628.6
  Top Layer w5: D3D.2@-450,1034.88 -450,780 -238.35,568.35 ZIF_S1.24@-238.35,493.98
NetC5_S2_1: E3D.1 L3_S2.12 | length 878.5
  Bottom Layer w5: L3_S2.12@420,2010 420,1195.12 E3D.1@465,1150.12
NetC5_S2_2: E3D.2 ZIF_S2.24 | length 628.6
  Bottom Layer w5: ZIF_S2.24@253.35,498.98 253.35,573.35 465,785 E3D.2@465,1039.88
NetC6_S1_1: C3H.1 L3_S1.16 | length 882.7
  Top Layer w5: C3H.1@-60,1145.12 -15,1190.12 -15,1995 L3_S1.16@-5,2005
NetC6_S1_2: C3H.2 ZIF_S1.48 | length 584.4
  Top Layer w5: C3H.2@-60,1034.88 -60,675 45.12,569.88 ZIF_S1.48@45.12,493.98
NetC6_S2_1: F3H.1 L3_S2.16 | length 882.7
  Bottom Layer w5: L3_S2.16@20,2010 30,2000 30,1195.12 F3H.1@75,1150.12
NetC6_S2_2: F3H.2 ZIF_S2.48 | length 584.4
  Bottom Layer w5: ZIF_S2.48@-30.12,498.98 -30.12,574.88 75,680 F3H.2@75,1039.88
NetC7_S1_1: A4E.1 L4_S1.12 | length 1073.4
  Top Layer w5: L4_S1.12@470,1260 485,1275 485,1965 440,2010 440,2244.88 A4E.1@485,2289.88
NetC7_S1_2: A4E.2 A4F.2 A4G.2 A4H.2 A5E.2 A5F.2 A5G.2 A5H.2 A6E.2 A6F.2 A6G.2 A6H.2 MDM.2 | length 6850.2
  Top Layer w5: A6E.2@460,2885.12 460,3005 ; A5E.2@475,2640.12 515,2680.12 515,3005 ; A4E.2@485,2400.12 525,2440.12 525,3005 ; A6F.2@495,2160.12 535,2200.12 535,3005 ; A5F.2@590,2885.12 590,3005 ; A4F.2@605,2640.12 645,2680.12 645,3005 ; A6G.2@615,2400.12 655,2440.12 655,3005 ; A5G.2@625,2160.12 665,2200.12 665,3005 ; A4G.2@720,2885.12 720,3005 ; A6H.2@730,2645.12 730,2690 770,2730 770,2935 745,2960 745,3005 ; A5H.2@740,2405.12 740,2450 780,2490 780,2940 755,2965 755,2995 ; A4H.2@750,2165.12 750,2195 790,2235 790,2945 765,2970 765,3000
  Top Layer w40: MDM.2@250,3370 445,3370 533,3282 533,3005 ; 460,3005 515,3005 525,3005 590,3005 645,3005 655,3005 665,3005 720,3005 745,3005 760,3005
NetC7_S2_1: H4E.1 L4_S2.12 | length 1073.4
  Bottom Layer w5: H4E.1@-470,2294.88 -425,2249.88 -425,2015 -470,1970 -470,1280 L4_S2.12@-455,1265
NetC7_S2_2: H4E.2 H4F.2 H4G.2 H4H.2 H5E.2 H5F.2 H5G.2 H5H.2 H6E.2 H6F.2 H6G.2 H6H.2 MDM.7 | length 7006.1
  Bottom Layer w5: -750,3015 -750,2975 -785,2940 -785,2210.12 H4H.2@-740,2165.12 ; -740,3020 -740,2970 -775,2935 -775,2450.12 H5H.2@-730,2405.12 ; -730,3005 -730,2965 -765,2930 -765,2690.12 H6H.2@-720,2645.12 ; H4G.2@-710,2885.12 -710,3025 ; H5G.2@-610,2165.12 -655,2210.12 -655,3005 -645,3015 ; H6G.2@-600,2405.12 -645,2450.12 -645,3015 ; H4F.2@-590,2645.12 -635,2690.12 -635,3025 -645,3015 ; H5F.2@-580,2885.12 -580,3025 ; H6F.2@-480,2165.12 -525,2210.12 -525,3005 -515,3015 ; H4E.2@-470,2405.12 -515,2450.12 -515,3015 ; H5E.2@-460,2645.12 -505,2690.12 -505,3025 -515,3015 ; H6E.2@-450,2885.12 -450,3015 -440,3025
  Bottom Layer w20: -225,3085 -200,3110 -200,3205 -180,3225 -145,3225 MDM.7@-100,3270
  Bottom Layer w40: -750,3025 -710,3025 -635,3025 -580,3025 -505,3025 -440,3025 -440,3065 -420,3085 -225,3085
NetC8_S1_1: B4A.1 L4_S1.16 | length 1065.1
  Top Layer w5: L4_S1.16@70,1260 80,1270 80,1980 50,2010 50,2244.88 B4A.1@95,2289.88
NetC8_S1_2: B4A.2 B4B.2 B4C.2 B4D.2 B5A.2 B5B.2 B5C.2 B5D.2 B6A.2 B6B.2 B6C.2 B6D.2 MDM.1 | length 6608.8
  Top Layer w5: B6A.2@70,2885.12 70,3005 ; B5A.2@85,2640.12 125,2680.12 125,3005 ; B4A.2@95,2400.12 135,2440.12 135,3005 ; B6B.2@105,2160.12 145,2200.12 145,3005 ; B5B.2@200,2885.12 200,3005 ; B4B.2@215,2640.12 250,2675.12 250,2727.31 255,2732.31 255,3005 ; B6C.2@225,2400.12 260,2435.12 260,2723.17 265,2728.17 265,3005 ; B5C.2@235,2160.12 270,2195.12 270,2719.02 275,2724.02 275,3005 ; B4C.2@330,2885.12 330,3005 ; B6D.2@345,2640.12 385,2680.12 385,3005 ; B5D.2@355,2400.12 395,2440.12 395,3005 ; B4D.2@365,2160.12 405,2200.12 405,3005
  Top Layer w20: 135,3005 145,3005 ; 200,3005 200,3195 220,3215 245,3215 MDM.1@300,3270
  Top Layer w40: 70,3005 125,3005 135,3005 ; 145,3005 200,3005 255,3005 265,3005 275,3005 330,3005 385,3005 395,3005 405,3005
NetC8_S2_1: G4A.1 L4_S2.16 | length 1065.1
  Bottom Layer w5: G4A.1@-80,2294.88 -35,2249.88 -35,2015 -65,1985 -65,1275 L4_S2.16@-55,1265
NetC8_S2_2: G4A.2 G4B.2 G4C.2 G4D.2 G5A.2 G5B.2 G5C.2 G5D.2 G6A.2 G6B.2 G6C.2 G6D.2 MDM.8 | length 6948.8
  Bottom Layer w5: G4D.2@-350,2165.12 -395,2210.12 -395,3020 -390,3025 -385,3020 ; G5D.2@-340,2405.12 -385,2450.12 -385,3020 ; G6D.2@-330,2645.12 -375,2690.12 -375,3010 -385,3020 ; G4C.2@-325,2890.12 G4C.2@-320,2885.12 -320,3025 ; -245,3025 -245,2742.31 -235,2732.31 -235,2680.12 G4B.2@-200,2645.12 ; G5C.2@-220,2165.12 -255,2200.12 -255,2725 -265,2735 -265,3025 -255,3015 -255,2738.17 -245,2728.17 -245,2440.12 G6C.2@-210,2405.12 ; G5B.2@-190,2885.12 -190,3025 ; MDM.8@-150,3370 -145,3370 MDM.8@-145,3365 ; -100,3025 -115,3010 -115,2690.12 G5A.2@-70,2645.12 ; G6B.2@-90,2165.12 -135,2210.12 -135,3025 -125,3015 -125,2450.12 G4A.2@-80,2405.12 ; G6A.2@-60,2885.12 -60,3025
  Bottom Layer w20: MDM.8@-145,3365 -105,3325 -75,3325 -50,3300 -50,3245 -100,3195 -100,3025
  Bottom Layer w40: -390,3025 -320,3025 -265,3025 -245,3025 -190,3025 -135,3025 -100,3025 -60,3025
NetC9_S1_1: A5E.1 L5_S1.12 | length 989.2
  Top Layer w5: L5_S1.12@445,1585 460,1600 460,1970 430,2000 430,2484.88 475,2529.88 A5E.1@480,2534.88
NetC9_S2_1: H5E.1 L5_S2.12 | length 989.2
  Bottom Layer w5: H5E.1@-465,2539.88 H5E.1@-460,2534.88 -415,2489.88 -415,2005 -445,1975 -445,1605 L5_S2.12@-430,1590
NetC10_S1_1: B5A.1 L5_S1.16 | length 978
  Top Layer w5: L5_S1.16@45,1585 45,1590 60,1605 60,1985 40,2005 40,2484.88 B5A.1@85,2529.88
NetC10_S2_1: G5A.1 L5_S2.16 | length 978
  Bottom Layer w5: G5A.1@-70,2534.88 -25,2489.88 -25,2010.86 -45,1990.86 -45,1610 -30,1595 L5_S2.16@-30,1590
NetC11_S1_1: A6E.1 L6_S1.12 | length 878.5
  Top Layer w5: L6_S1.12@420,1910 420,2724.88 A6E.1@465,2769.88
NetC11_S2_1: H6E.1 L6_S2.12 | length 878.5
  Bottom Layer w5: H6E.1@-450,2774.88 -405,2729.88 L6_S2.12@-405,1915
NetC12_S1_1: B6A.1 L6_S1.16 | length 882.7
  Top Layer w5: L6_S1.16@20,1910 30,1920 30,2724.88 B6A.1@75,2769.88
NetC12_S2_1: G6A.1 L6_S2.16 | length 882.7
  Bottom Layer w5: G6A.1@-60,2774.88 -15,2729.88 -15,1925 L6_S2.16@-5,1915
NetC13_S1_1: D1C.1 L1_S1.11 | length 1305.1
  Top Layer w5: D1C.1@-590,1385.12 -545,1430.12 -545,1920 -570,1945 -570,2640 L1_S1.11@-555,2655
NetC13_S1_2: D1C.2 ZIF_S1.14 | length 914.9
  Top Layer w5: D1C.2@-590,1274.88 -635,1229.88 -635,920 -500,785 -500,715 -356.46,571.46 ZIF_S1.14@-356.46,498.98 ZIF_S1.14@-356.46,493.98
NetC13_S2_1: E1C.1 L1_S2.11 | length 1337.1
  Bottom Layer w5: L1_S2.11@570,2660 585,2645 585,1950 560,1925 560,1435.12 E1C.1@605,1390.12 ; E1C.1@588,1361 E1C.1@620,1361
NetC13_S2_2: E1C.2 ZIF_S2.14 | length 1040.9
  Bottom Layer w5: ZIF_S2.14@371.46,498.98 371.46,576.46 412.5,617.5 627.5,617.5 650,640 650,1234.88 E1C.2@605,1279.88
NetC14_S1_1: C1G.1 L1_S1.15 | length 1296.8
  Top Layer w5: C1G.1@-200,1385.12 -155,1430.12 -155,1909.14 -165,1919.14 -165,2640 -155,2650 L1_S1.15@-155,2655
NetC14_S1_2: C1G.2 ZIF_S1.38 | length 870.8
  Top Layer w5: C1G.2@-200,1274.88 -235,1239.88 -235,1190 -245,1180 -245,745 -72.99,572.99 ZIF_S1.38@-72.99,493.98
NetC14_S2_1: F1G.1 L1_S2.15 | length 1296.8
  Bottom Layer w5: L1_S2.15@170,2660 170,2655 180,2645 180,1924.14 170,1914.14 170,1435.12 F1G.1@215,1390.12
NetC14_S2_2: F1G.2 ZIF_S2.38 | length 870.8
  Bottom Layer w5: ZIF_S2.38@87.99,498.98 87.99,577.99 260,750 260,1182.69 250,1192.69 250,1244.88 F1G.2@215,1279.88
NetC15_S1_1: D2C.1 L2_S1.11 | length 1213.9
  Top Layer w5: D2C.1@-580,1145.12 -535,1190.12 -535,1935 -545,1945 -545,2315 L2_S1.11@-530,2330
NetC15_S1_2: D2C.2 ZIF_S1.16 | length 643.3
  Top Layer w5: D2C.2@-580,1034.88 -580,880 -490,790 -490,725 -332.83,567.83 ZIF_S1.16@-332.83,498.98 ZIF_S1.16@-332.83,493.98
NetC15_S2_1: E2C.1 L2_S2.11 | length 1213.9
  Bottom Layer w5: L2_S2.11@545,2335 560,2320 560,1950 550,1940 550,1195.12 E2C.1@595,1150.12
NetC15_S2_2: E2C.2 ZIF_S2.16 | length 643.3
  Bottom Layer w5: ZIF_S2.16@347.83,498.98 347.83,572.83 515,740 515,915 595,995 E2C.2@595,1039.88
NetC16_S1_1: C2G.1 L2_S1.15 | length 1209.7
  Top Layer w5: C2G.1@-190,1145.12 -145,1190.12 -145,2310 -130,2325 L2_S1.15@-130,2330
NetC16_S1_2: C2G.2 ZIF_S1.40 | length 599.2
  Top Layer w5: C2G.2@-190,1034.88 -190,710 -49.37,569.37 ZIF_S1.40@-49.37,493.98
NetC16_S2_1: F2G.1 L2_S2.15 | length 1209.7
  Bottom Layer w5: L2_S2.15@145,2335 145,2330 160,2315 160,1195.12 F2G.1@205,1150.12
NetC16_S2_2: F2G.2 ZIF_S2.40 | length 599.2
  Bottom Layer w5: ZIF_S2.40@64.37,498.98 64.37,574.37 205,715 F2G.2@205,1039.88
NetC17_S1_1: D3C.1 L3_S1.11 | length 150.2
  Top Layer w5: L3_S1.11@-505,2005 -505,1955 -480,1930 D3C.1@-480,1865.12
NetC17_S1_2: D3C.2 ZIF_S1.18 | length 1368.9
  Top Layer w5: D3C.2@-480,1754.88 -525,1709.88 -525,985 -480,940 -480,740 -309.21,569.21 ZIF_S1.18@-309.21,498.98 ZIF_S1.18@-309.21,493.98
NetC17_S2_1: E3C.1 L3_S2.11 | length 150.2
  Bottom Layer w5: E3C.1@495,1870.12 495,1935 520,1960 L3_S2.11@520,2010
NetC17_S2_2: E3C.2 ZIF_S2.18 | length 1368.9
  Bottom Layer w5: ZIF_S2.18@324.21,498.98 324.21,574.21 505,755 505,955 540,990 540,1714.88 E3C.2@495,1759.88
NetC18_S1_1: C3G.1 L3_S1.15 | length 146.1
  Top Layer w5: L3_S1.15@-105,2005 -105,1945 -90,1930 C3G.1@-90,1865.12
NetC18_S1_2: C3G.2 ZIF_S1.42 | length 1324.8
  Top Layer w5: C3G.2@-90,1754.88 -135,1709.88 -135,680 -25.75,570.75 ZIF_S1.42@-25.75,493.98
NetC18_S2_1: F3G.1 L3_S2.15 | length 146.1
  Bottom Layer w5: F3G.1@105,1870.12 105,1935 120,1950 L3_S2.15@120,2010
NetC18_S2_2: F3G.2 ZIF_S2.42 | length 1324.8
  Bottom Layer w5: ZIF_S2.42@40.75,498.98 40.75,575.75 150,685 150,1714.88 F3G.2@105,1759.88
NetC19_S1_1: A4F.1 L4_S1.11 | length 1337.1
  Top Layer w5: L4_S1.11@570,1260 585,1275 585,1970 560,1995 560,2484.88 A4F.1@605,2529.88 ; A4F.1@588,2559 A4F.1@620,2559
NetC19_S2_1: H4F.1 L4_S2.11 | length 1337.1
  Bottom Layer w5: H4F.1@-605,2564 H4F.1@-573,2564 ; H4F.1@-590,2534.88 -545,2489.88 -545,2000 -570,1975 -570,1280 L4_S2.11@-555,1265
NetC20_S1_1: B4B.1 L4_S1.15 | length 1296.8
  Top Layer w5: L4_S1.15@170,1260 170,1265 180,1275 180,1995 170,2005 170,2484.88 B4B.1@215,2529.88
NetC20_S2_1: G4B.1 L4_S2.15 | length 1296.8
  Bottom Layer w5: G4B.1@-200,2534.88 -155,2489.88 -155,2010.86 -165,2000.86 -165,1280 -155,1270 L4_S2.15@-155,1265
NetC21_S1_1: A5F.1 L5_S1.11 | length 1213.9
  Top Layer w5: L5_S1.11@545,1585 560,1600 560,1970 550,1980 550,2724.88 A5F.1@595,2769.88
NetC21_S2_1: H5F.1 L5_S2.11 | length 1213.9
  Bottom Layer w5: H5F.1@-580,2774.88 -535,2729.88 -535,1985 -545,1975 -545,1605 L5_S2.11@-530,1590
NetC22_S1_1: B5B.1 L5_S1.15 | length 1209.7
  Top Layer w5: L5_S1.15@145,1585 145,1590 160,1605 160,2724.88 B5B.1@205,2769.88
NetC22_S2_1: G5B.1 L5_S2.15 | length 1209.7
  Bottom Layer w5: G5B.1@-190,2774.88 -145,2729.88 -145,1610 -130,1595 L5_S2.15@-130,1590
NetC23_S1_1: A6F.1 L6_S1.11 | length 150.2
  Top Layer w5: A6F.1@495,2049.88 495,1985 520,1960 L6_S1.11@520,1910
NetC23_S2_1: H6F.1 L6_S2.11 | length 150.2
  Bottom Layer w5: L6_S2.11@-505,1915 -505,1965 -480,1990 H6F.1@-480,2054.88
NetC24_S1_1: B6B.1 L6_S1.15 | length 146.1
  Top Layer w5: B6B.1@105,2049.88 105,1985 120,1970 L6_S1.15@120,1910
NetC24_S2_1: G6B.1 L6_S2.15 | length 146.1
  Bottom Layer w5: L6_S2.15@-105,1915 -105,1975 -90,1990 G6B.1@-90,2054.88
NetC25_S1_1: D1B.1 L1_S1.10 | length 1532.7
  Top Layer w5: D1B.1@-710,1145.12 -665,1190.12 -665,2645 L1_S1.10@-655,2655
NetC25_S1_2: D1B.2 ZIF_S1.8 | length 751.7
  Top Layer w5: D1B.2@-710,1034.88 -710,695 -610,595 -450,595 -427.32,572.32 ZIF_S1.8@-427.32,498.98 ZIF_S1.8@-427.32,493.98
NetC25_S2_1: E1B.1 L1_S2.10 | length 1532.7
  Bottom Layer w5: L1_S2.10@670,2660 680,2650 680,1195.12 E1B.1@725,1150.12
NetC25_S2_2: E1B.2 ZIF_S2.8 | length 791.4
  Bottom Layer w5: ZIF_S2.8@442.32,498.98 442.32,560 469.82,587.5 697.5,587.5 725,615 E1B.2@725,1039.88
NetC26_S1_1: C1F.1 L1_S1.14 | length 1536.8
  Top Layer w5: C1F.1@-320,1145.12 -275,1190.12 -275,1965 -265,1975 -265,2645 L1_S1.14@-255,2655
NetC26_S1_2: C1F.2 ZIF_S1.32 | length 613.9
  Top Layer w5: C1F.2@-320,1034.88 -320,745 -143.86,568.86 ZIF_S1.32@-143.86,493.98
NetC26_S2_1: F1F.1 L1_S2.14 | length 1536.8
  Bottom Layer w5: L1_S2.14@270,2660 280,2650 280,1205.12 F1F.1@335,1150.12
NetC26_S2_2: F1F.2 ZIF_S2.32 | length 613.9
  Bottom Layer w5: ZIF_S2.32@158.86,498.98 158.86,573.86 335,750 F1F.2@335,1039.88
NetC27_S1_1: D2B.1 L2_S1.10 | length 485.6
  Top Layer w5: L2_S1.10@-630,2330 -645,2315 -645,1900.12 D2B.1@-610,1865.12
NetC27_S1_2: D2B.2 ZIF_S1.10 | length 1480.3
  Top Layer w5: D2B.2@-610,1754.88 -655,1709.88 -655,655 -605,605 -440,605 -403.7,568.7 ZIF_S1.10@-403.7,498.98 ZIF_S1.10@-403.7,493.98
NetC27_S2_1: E2B.1 L2_S2.10 | length 485.6
  Bottom Layer w5: E2B.1@625,1870.12 660,1905.12 660,2320 L2_S2.10@645,2335
NetC27_S2_2: E2B.2 ZIF_S2.10 | length 1499.3
  Bottom Layer w5: ZIF_S2.10@418.7,498.98 418.7,573.7 442.5,597.5 640,597.5 670,627.5 670,1714.88 E2B.2@625,1759.88
NetC28_S1_1: C2F.1 L2_S1.14 | length 481.5
  Top Layer w5: L2_S1.14@-230,2330 -245,2315 -245,1890.12 C2F.1@-220,1865.12
NetC28_S1_2: C2F.2 ZIF_S1.34 | length 1339.5
  Top Layer w5: C2F.2@-220,1754.88 -265,1709.88 -265,715 -120.24,570.24 ZIF_S1.34@-120.24,498.98 ZIF_S1.34@-120.24,493.98
NetC28_S2_1: F2F.1 L2_S2.14 | length 481.5
  Bottom Layer w5: F2F.1@235,1870.12 260,1895.12 260,2320 L2_S2.14@245,2335
NetC28_S2_2: F2F.2 ZIF_S2.34 | length 1339.5
  Bottom Layer w5: ZIF_S2.34@135.24,498.98 135.24,575.24 280,720 280,1190.98 270,1200.98 270,1724.88 F2F.2@235,1759.88
NetC29_S1_1: D3B.1 L3_S1.10 | length 422.2
  Top Layer w5: L3_S1.10@-605,2005 -605,1945 -555,1895 -555,1665 -594.88,1625.12 D3B.1@-600,1625.12
NetC29_S1_2: D3B.2 ZIF_S1.12 | length 1251.8
  Top Layer w5: D3B.2@-600,1514.88 -645,1469.88 -645,660 -600,615 -425,615 -380.08,570.08 ZIF_S1.12@-380.08,498.98 ZIF_S1.12@-380.08,493.98
NetC29_S2_1: E3B.1 L3_S2.10 | length 422.2
  Bottom Layer w5: E3B.1@615,1630.12 609.88,1630.12 570,1670 570,1900 620,1950 L3_S2.10@620,2010
NetC29_S2_2: E3B.2 ZIF_S2.12 | length 1271.3
  Bottom Layer w5: ZIF_S2.12@395.08,498.98 395.08,575.08 427.5,607.5 635.86,607.5 660,631.64 660,1474.88 E3B.2@615,1519.88
NetC30_S1_1: C3F.1 L3_S1.14 | length 415.1
  Top Layer w5: C3F.1@-210,1625.12 -165,1670.12 -165,1905 -205,1945 L3_S1.14@-205,2005
NetC30_S1_2: C3F.2 ZIF_S1.36 | length 1105.2
  Top Layer w5: C3F.2@-210,1514.88 -255,1469.88 -255,730 -96.61,571.61 ZIF_S1.36@-96.61,498.98 ZIF_S1.36@-96.61,493.98
NetC30_S2_1: F3F.1 L3_S2.14 | length 415.1
  Bottom Layer w5: L3_S2.14@220,2010 220,1950 180,1910 180,1675.12 F3F.1@225,1630.12
NetC30_S2_2: F3F.2 ZIF_S2.36 | length 1105.2
  Bottom Layer w5: ZIF_S2.36@111.61,498.98 111.61,576.61 270,735 270,1186.83 260,1196.83 260,1484.88 F3F.2@225,1519.88
NetC31_S1_1: A4G.1 L4_S1.10 | length 1532.7
  Top Layer w5: L4_S1.10@670,1260 680,1270 680,2724.88 A4G.1@725,2769.88
NetC31_S2_1: H4G.1 L4_S2.10 | length 1532.7
  Bottom Layer w5: H4G.1@-710,2774.88 -665,2729.88 -665,1275 L4_S2.10@-655,1265
NetC32_S1_1: B4C.1 L4_S1.14 | length 1536.8
  Top Layer w5: L4_S1.14@270,1260 280,1270 280,2714.88 B4C.1@335,2769.88
NetC32_S2_1: G4C.1 L4_S2.14 | length 1536.8
  Bottom Layer w5: G4C.1@-320,2774.88 -265,2719.88 -265,1275 L4_S2.14@-255,1265
NetC33_S1_1: A5G.1 L5_S1.10 | length 485.6
  Top Layer w5: A5G.1@625,2049.88 660,2014.88 660,1600 L5_S1.10@645,1585
NetC33_S2_1: H5G.1 L5_S2.10 | length 485.6
  Bottom Layer w5: L5_S2.10@-630,1590 -645,1605 -645,2019.88 H5G.1@-610,2054.88
NetC34_S1_1: B5C.1 L5_S1.14 | length 481.5
  Top Layer w5: B5C.1@235,2049.88 260,2024.88 260,1600 L5_S1.14@245,1585
NetC34_S2_1: G5C.1 L5_S2.14 | length 481.5
  Bottom Layer w5: L5_S2.14@-230,1590 -245,1605 -245,2029.88 G5C.1@-220,2054.88
NetC35_S1_1: A6G.1 L6_S1.10 | length 422.2
  Top Layer w5: A6G.1@615,2289.88 609.88,2289.88 570,2250 570,2020 620,1970 L6_S1.10@620,1910
NetC35_S2_1: H6G.1 L6_S2.10 | length 422.2
  Bottom Layer w5: L6_S2.10@-605,1915 -605,1975 -555,2025 -555,2255 -594.88,2294.88 H6G.1@-600,2294.88
NetC36_S1_1: B6C.1 L6_S1.14 | length 415.1
  Top Layer w5: L6_S1.14@220,1910 220,1970 180,2010 180,2244.88 B6C.1@225,2289.88
NetC36_S2_1: G6C.1 L6_S2.14 | length 415.1
  Bottom Layer w5: G6C.1@-210,2294.88 -165,2249.88 -165,2015 -205,1975 L6_S2.14@-205,1915
NetC37_S1_1: D1A.1 L1_S1.9 | length 808.5
  Top Layer w5: L1_S1.9@-755,2655 -770,2640 -770,1895.12 D1A.1@-740,1865.12
NetC37_S1_2: D1A.2 ZIF_S1.2@-498.19,498.98 | length 1465.7
  Top Layer w5: D1A.2@-740,1754.88 -785,1709.88 -785,725 -625,565 -510,565 -498.19,553.19 ZIF_S1.2@-498.19,498.98 ZIF_S1.2@-498.19,493.98
NetC37_S2_1: E1A.1 L1_S2.9 | length 808.5
  Bottom Layer w5: E1A.1@755,1870.12 785,1900.12 785,2645 L1_S2.9@770,2660
NetC37_S2_2: E1A.2 ZIF_S2.2@513.19,498.98 | length 1507.8
  Bottom Layer w5: ZIF_S2.2@513.19,498.98 513.19,548.19 521.59,556.59 766.59,556.59 795,585 795,1690 E1A.2@755,1730
NetC38_S1_1: C1E.1 L1_S1.13 | length 800.2
  Top Layer w5: L1_S1.13@-355,2655 -365,2645 -365,1880.12 C1E.1@-350,1865.12
NetC38_S1_2: C1E.2 ZIF_S1.26 | length 1354.2
  Top Layer w5: C1E.2@-350,1754.88 -395,1709.88 -395,750 -214.72,569.72 ZIF_S1.26@-214.72,493.98
NetC38_S2_1: F1E.1 L1_S2.13 | length 800.2
  Bottom Layer w5: F1E.1@365,1870.12 380,1885.12 380,2650 L1_S2.13@370,2660
NetC38_S2_2: F1E.2 ZIF_S2.26 | length 1354.2
  Bottom Layer w5: ZIF_S2.26@229.72,498.98 229.72,574.72 410,755 410,1714.88 F1E.2@365,1759.88
NetC39_S1_1: D2A.1 L2_S1.9 | length 754.6
  Top Layer w5: D2A.1@-730,1625.12 -685,1670.12 -685,1905 -745,1965 -745,2315 L2_S1.9@-730,2330
NetC39_S1_2: D2A.2 ZIF_S1.4 | length 1237.5
  Top Layer w5: D2A.2@-730,1514.88 -775,1469.88 -775,730 -620,575 -494.57,575 -474.57,555 ZIF_S1.4@-474.57,498.98 ZIF_S1.4@-474.57,493.98
NetC39_S2_1: E2A.1 L2_S2.9 | length 754.6
  Bottom Layer w5: E2A.1@745,1630.12 700,1675.12 700,1910 760,1970 760,2320 L2_S2.9@745,2335
NetC39_S2_2: E2A.2 ZIF_S2.4 | length 1312.4
  Bottom Layer w5: ZIF_S2.4@489.57,498.98 489.57,560 497.07,567.5 757.5,567.5 785,595 785,1440 745,1480 E2A.2@745,1519.88
NetC40_S1_1: C2E.1 L2_S1.13 | length 729.2
  Top Layer w5: L2_S1.13@-345,2315 -345,1955 -295,1905 -295,1670.12 C2E.1@-340,1625.12
NetC40_S1_2: C2E.2 ZIF_S1.28 | length 1119.9
  Top Layer w5: C2E.2@-340,1514.88 -385,1469.88 -385,765 -191.1,571.1 ZIF_S1.28@-191.1,493.98
NetC40_S2_1: F2E.1 L2_S2.13 | length 729.2
  Bottom Layer w5: F2E.1@355,1630.12 310,1675.12 310,1910 360,1960 L2_S2.13@360,2320
NetC40_S2_2: F2E.2 ZIF_S2.28 | length 1119.9
  Bottom Layer w5: ZIF_S2.28@206.1,498.98 206.1,576.1 400,770 400,1474.88 F2E.2@355,1519.88
NetC41_S1_1: D3A.1 L3_S1.9 | length 650.9
  Top Layer w5: D3A.1@-720,1385.12 -675,1430.12 -675,1915 -705,1945 L3_S1.9@-705,2005
NetC41_S1_2: D3A.2 ZIF_S1.6 | length 1008
  Top Layer w5: D3A.2@-720,1274.88 -765,1229.88 -765,735 -615,585 -475,585 -450,560 ZIF_S1.6@-450,498.03
NetC41_S2_1: E3A.1 L3_S2.9 | length 650.9
  Bottom Layer w5: L3_S2.9@720,2010 720,1950 690,1920 690,1435.12 E3A.1@735,1390.12
NetC41_S2_2: E3A.2 ZIF_S2.6 | length 1077.1
  Bottom Layer w5: ZIF_S2.6@465,503.03 465,555 487.5,577.5 752.5,577.5 775,600 775,1205 735,1245 E3A.2@735,1279.88
NetC42_S1_1: C3E.1 L3_S1.13 | length 646.8
  Top Layer w5: C3E.1@-330,1385.12 -285,1430.12 -285,1915 -305,1935 L3_S1.13@-305,2005
NetC42_S1_2: C3E.2 ZIF_S1.30 | length 885.5
  Top Layer w5: C3E.2@-330,1274.88 -375,1229.88 -375,775 -167.48,567.48 ZIF_S1.30@-167.48,493.98
NetC42_S2_1: F3E.1 L3_S2.13 | length 646.8
  Bottom Layer w5: L3_S2.13@320,2010 320,1940 300,1920 300,1435.12 F3E.1@345,1390.12
NetC42_S2_2: F3E.2 ZIF_S2.30 | length 885.5
  Bottom Layer w5: ZIF_S2.30@182.48,498.98 182.48,572.48 390,780 390,1234.88 F3E.2@345,1279.88
NetC43_S1_1: A4H.1 L4_S1.9 | length 808.5
  Top Layer w5: A4H.1@755,2049.88 785,2019.88 785,1275 L4_S1.9@770,1260
NetC43_S2_1: H4H.1 L4_S2.9 | length 808.5
  Bottom Layer w5: L4_S2.9@-755,1265 -770,1280 -770,2024.88 H4H.1@-740,2054.88
NetC44_S1_1: B4D.1 L4_S1.13 | length 800.2
  Top Layer w5: B4D.1@365,2049.88 380,2034.88 380,1270 L4_S1.13@370,1260
NetC44_S2_1: G4D.1 L4_S2.13 | length 800.2
  Bottom Layer w5: L4_S2.13@-355,1265 -365,1275 -365,2039.88 G4D.1@-350,2054.88
NetC45_S1_1: A5H.1 L5_S1.9 | length 754.6
  Top Layer w5: L5_S1.9@745,1585 760,1600 760,1950 700,2010 700,2244.88 A5H.1@745,2289.88
NetC45_S2_1: H5H.1 L5_S2.9 | length 754.6
  Bottom Layer w5: L5_S2.9@-730,1590 -745,1605 -745,1955 -685,2015 -685,2249.88 H5H.1@-730,2294.88
NetC46_S1_1: B5D.1 L5_S1.13 | length 729.2
  Top Layer w5: B5D.1@355,2289.88 310,2244.88 310,2010 360,1960 360,1600
NetC46_S2_1: G5D.1 L5_S2.13 | length 729.2
  Bottom Layer w5: L5_S2.13@-345,1605 -345,1965 -295,2015 -295,2249.88 G5D.1@-340,2294.88
NetC47_S1_1: A6H.1 L6_S1.9 | length 650.9
  Top Layer w5: L6_S1.9@720,1910 720,1970 690,2000 690,2484.88 A6H.1@735,2529.88
NetC47_S2_1: H6H.1 L6_S2.9 | length 650.9
  Bottom Layer w5: H6H.1@-720,2534.88 -675,2489.88 -675,2005 -705,1975 L6_S2.9@-705,1915
NetC48_S1_1: B6D.1 L6_S1.13 | length 646.8
  Top Layer w5: L6_S1.13@320,1910 320,1980 300,2000 300,2484.88 B6D.1@345,2529.88
NetC48_S2_1: G6D.1 L6_S2.13 | length 646.8
  Bottom Layer w5: G6D.1@-330,2534.88 -285,2489.88 -285,2005 -305,1985 L6_S2.13@-305,1915